# Altium PCB FOC_Driver.PcbDoc (part 2 of 2)
Units mil, origin at the board's own origin, x right, y up, seen from the top; angles counter-clockwise.
Board outline 3543.31 x 2362.2 mil, 4 copper layers (Top Layer 1, Ground, Power, Bottom Layer 1), stack 23.756 mil thick; 79 components, 64 nets, 313 pads, 178 vias.
Unrouted connection lines stored in the file: 65.
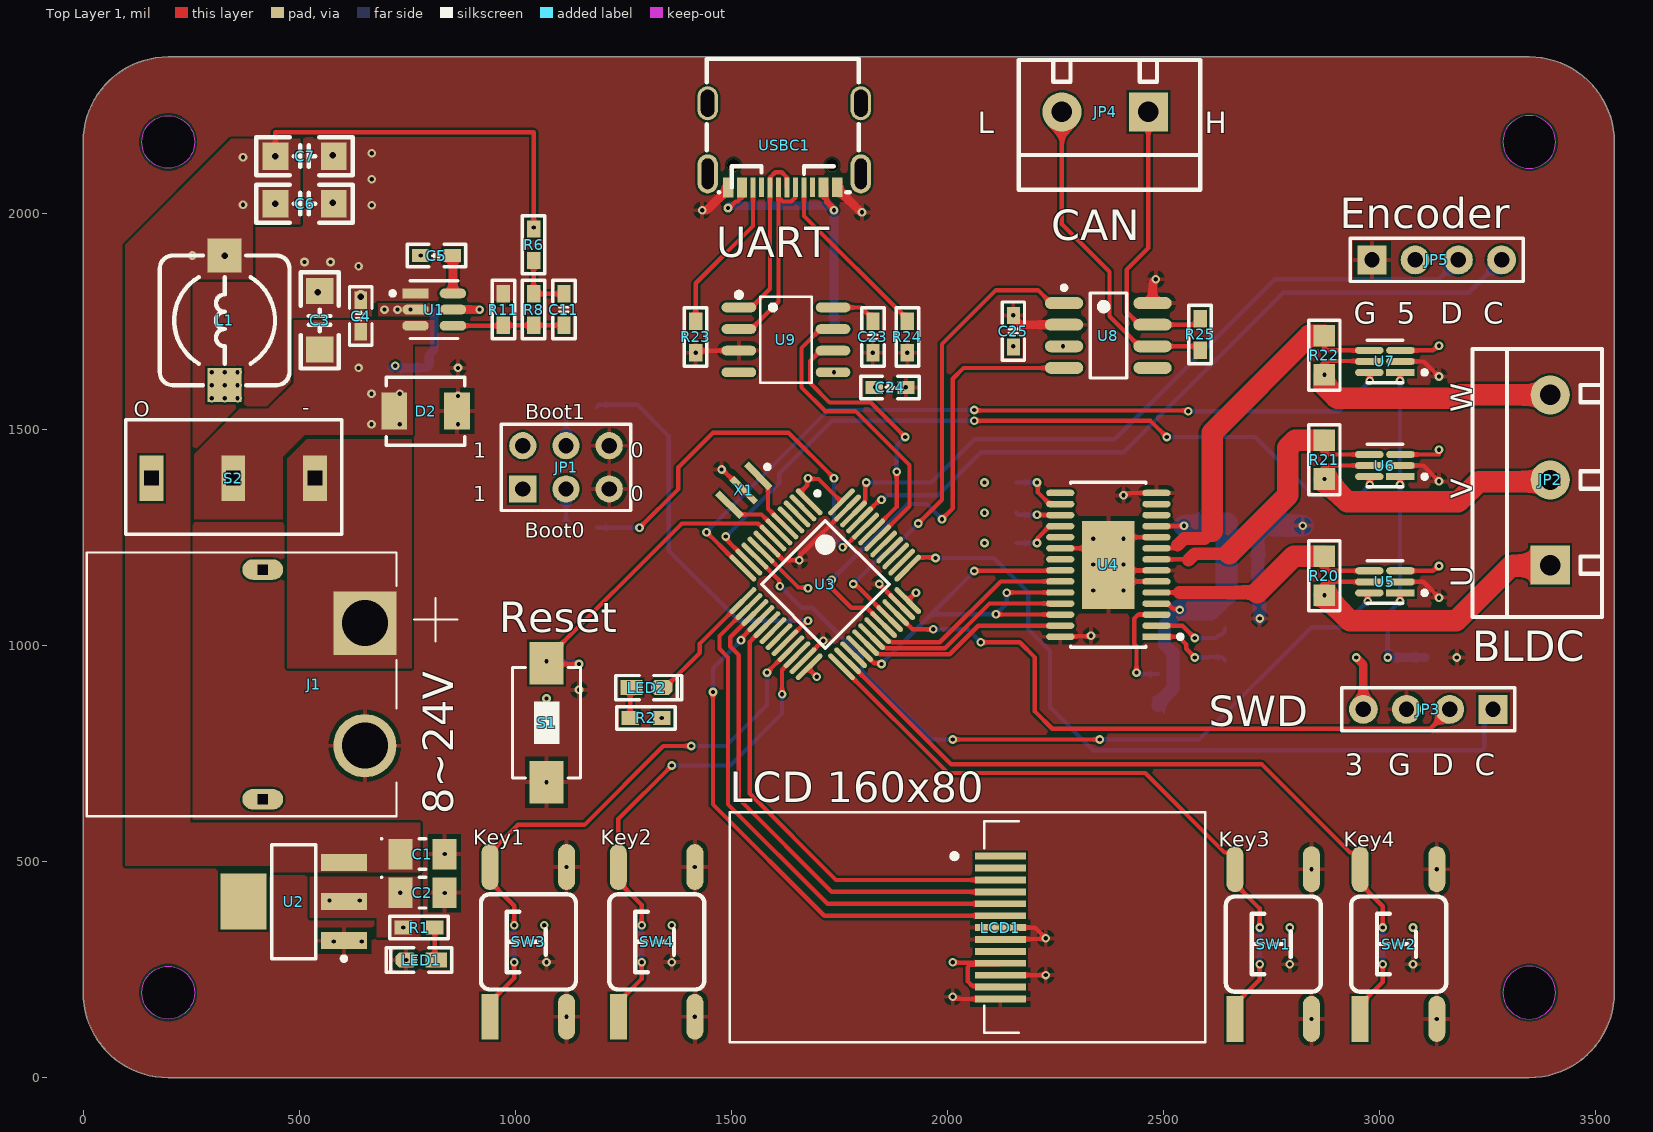
[diagram p0: Top Layer 1 view]

## Other copper (continued)
Power (plane layer: these items are gaps in the copper): (continued)
  lines w8: -12.5,1602.5 575,1602.5 ; 510,2365 510,1965 720,1965 720,2012.5 1087.5,2012.5 1087.5,1952.5 3140,1952.5 3140,1822.5 2682.5,1822.5 2682.5,1552.5 ; 2682.5,1552.5 1682.5,1552.5 1637.5,1597.5 1367.5,1597.5 1250,1715 575,1715 575,1425 865,1425 912.5,1472.5 962.5,1522.5 1267.5,1522.5 1337.5,1452.5 1577.5,1452.5 1612.5,1417.5 2192.5,1417.5 2222.5,1387.5 2442.5,1387.5 2442.5,1042.5 2682.5,1042.5 2682.5,1552.5

## Silkscreen, mask and mechanical layers (free items; w line width, h text height)
Top Overlay:
  text "L" at 2070,2185 h50
  text "H" at 2595,2185 h50
  text "Encoder" at 2907.5,1942.5 h120
  text "CAN" at 2240,1915 h120
  text "UART" at 1465,1875 h120
  text "G" at 2940,1745 h50
  text "5" at 3040,1745 h50
  text "D" at 3140,1745 h50
  text "C" at 3240,1745 h50
  text "W" at 3215,1540 h50 r90
  text "-" at 507.5,1522.5 h60
  text "O" at 117.5,1517.5 h60
  text "Boot1" at 1022.61,1512.5 h60
  text "1" at 902.5,1422.5 h60
  text "0" at 1267.5,1422.5 h60
  text "V" at 3215,1340 h50 r90
  text "1" at 902.5,1322.5 h60
  text "0" at 1267.5,1322.5 h60
  text "Boot0" at 1022.5,1237.5 h60
  text "U" at 3215,1135 h50 r90
  text "Reset" at 962.5,1007.5 h120
  text "BLDC" at 3215,940 h120
  text "SWD" at 2605,790 h120
  text "3" at 2920,700 h50
  text "G" at 3020,700 h50
  text "D" at 3120,700 h50
  text "C" at 3220,700 h50
  text "LCD 160x80" at 1496.52,613.89 h120
  text "8~24V" at 880,610 h120 r90
  text "Key1" at 902.5,527.5 h60
  text "Key2" at 1197.5,527.5 h60
  text "Key3" at 2627.5,522.5 h60
  text "Key4" at 2917.5,522.5 h60
Mechanical 1:
  circle w2.5: c0,0 r1.25
  circle w5: c196.85,2165.35 r61.02
  circle w5: c3346.46,2165.35 r61.02
  circle w5: c196.85,196.85 r61.02
  circle w5: c3346.46,196.85 r61.02
  circle w2.5: c3543.31,0 r1.25
  circle w2.5: c3543.31,2362.2 r1.25
  lines w5: 0,196.85 ccw(c196.85,196.85) 196.85,0 3346.46,0 ccw(c3346.46,196.85) 3543.31,196.85 3543.31,2165.35 ccw(c3346.46,2165.35) 3346.46,2362.2 196.85,2362.2 ccw(c196.85,2165.35) 0,2165.35 0,196.85